# Altium PCB SPI-主板-开关.PcbDoc (part 4 of 11)
Units mm, origin at the board's own origin, x right, y up, seen from the top; angles counter-clockwise.
Board outline 97.69 x 103.45 mm, 2 copper layers (Top Layer, Bottom Layer); 86 components, 63 nets, 260 pads, 250 vias.
Unrouted connection lines stored in the file: 6.
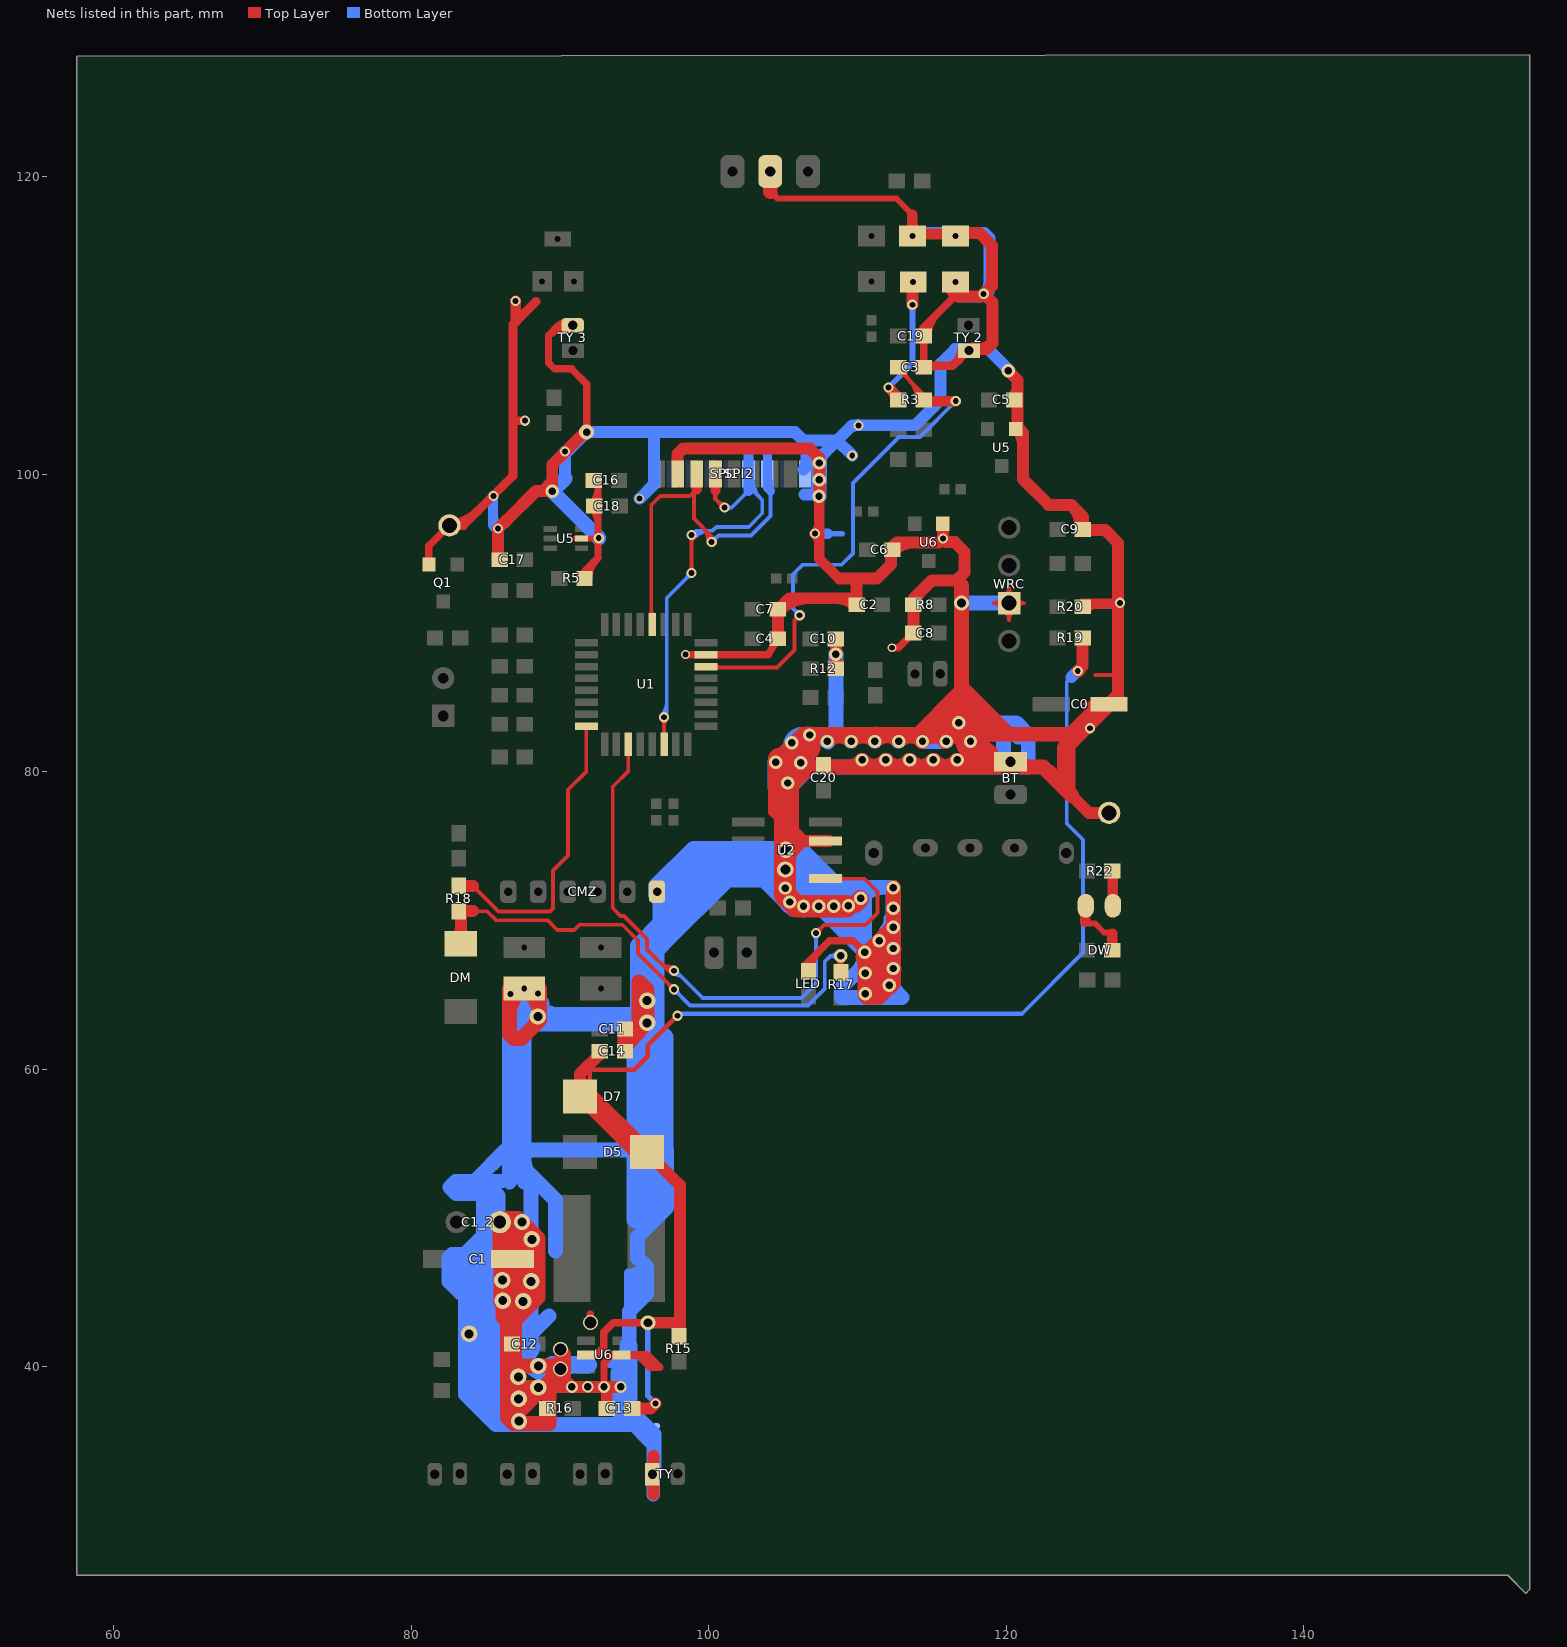
[diagram p4: the nets of this part, all layers, seen from the top]

## Via types
v1: diameter 0.9, hole 0.5, Top Layer to Bottom Layer, 104 vias
v2: diameter 0.68, hole 0.4, Top Layer to Bottom Layer, 100 vias
v3: diameter 1.1, hole 0.6, Top Layer to Bottom Layer, tented both sides, 16 vias
v4: diameter 1, hole 0.8, Top Layer to Bottom Layer, tented both sides, 8 vias
v5: diameter 1, hole 0.6, Top Layer to Bottom Layer, 4 vias
v6: diameter 0.8, hole 0.5, Top Layer to Bottom Layer, 4 vias
v7: diameter 0.7, hole 0.4, Top Layer to Bottom Layer, 4 vias
v8: diameter 0.6, hole 0.4, Top Layer to Bottom Layer, 3 vias
v9: diameter 1.1, hole 0.68, Top Layer to Bottom Layer, 2 vias
v10: diameter 0.8, hole 0.4, Top Layer to Bottom Layer, 2 vias
v11: diameter 1, hole 0.5, Top Layer to Bottom Layer, 1 vias
v12: diameter 0.9, hole 0.6, Top Layer to Bottom Layer, tented bottom, 1 vias
v13: diameter 1.2, hole 0.68, Top Layer to Bottom Layer, 1 vias

## Nets (pads, with @x,y where several pads share a name; then routed paths per layer and width w, separated by ;. In a path a pad name is that pad's centre, name@x,y a point inside that pad or via, vN(x,y) a via of type N, cw(c..) or ccw(c..) an arc to the next point about the centre after c; other vN are vias at no path point) (continued)
C-84: C13.1 C14.1 D5.2 D7.1 R15.1 R19.1 U6.5 | length 104.4
  Top Layer w0.3: D7.1@91.35,58.887 91.599,59.136 91.77,58.965 91.77,59.057 92.006,58.822 92.006,59.963 94.989,59.963 95.91,60.884 95.91,61.62 v2(97.892,63.602)
  Top Layer w0.5: D7.1@91.35,58.166 D7.1@91.77,58.166 ; U6.5@91.75,40.8 92.413,40.8 92.939,41.326 92.939,42.316 93.583,42.961 v5(95.91,42.961) ; D5.2@95.506,54.43 D5.2@95.85,54.43
  Top Layer w0.8: D7.1@91.35,58.166 91.35,58.887 91.35,59.688 C14.1@92.673,61.011 ; C13.1@94.85,37.2 96.092,37.2 v2(96.418,37.526) ; D5.2@95.85,54.43 98.069,52.211 98.069,42.961 ; v5(95.91,42.961) 98.069,42.961 ; R15.1@98,42.05 98.069,42.119 98.069,42.961 ; v2(124.816,86.792) 125.146,87.122 R19.1@125.146,89 ; v2@124.858,86.749 ccw(c124.163,87.444) 125.146,87.444 ; v2@124.858,86.749 ccw(c124.163,87.444) 125.146,87.444 ; v2@124.858,86.749 ccw(c124.163,87.444) 125.146,87.444
  Top Layer w1.5: D7.1@91.77,58.166 D5.2@95.506,54.43
  Bottom Layer w0.254: 121.049,63.721 125.171,67.843 125.171,75.438 124.079,76.53 124.079,86.055 v2(124.816,86.792) ; 124.452,86.428 ccw(c124.088,86.792) v2@124.603,86.792 ; 124.452,86.428 cw(c124.816,86.065) v2@124.816,86.579 ; 124.452,86.428 ccw(c124.088,86.792) v2@124.603,86.792 ; 124.452,86.428 cw(c124.816,86.065) v2@124.816,86.579 ; 124.452,86.428 ccw(c124.088,86.792) v2@124.603,86.792 ; 124.452,86.428 cw(c124.816,86.065) v2@124.816,86.579
  Bottom Layer w0.3: v2(97.892,63.602) 98.011,63.721 121.049,63.721
  Bottom Layer w0.35: v5(95.91,42.961) 95.91,38.034 v2(96.418,37.526)
  Bottom Layer w0.8: 124.384,86.36 v2(124.816,86.792) v2@124.841,86.792
CE: SPI1.6 SPI2.6 U1.12 | length 40.6
  Top Layer w0.254: U1.12@96.139,89.902 96.139,97.942 96.749,98.552 98.73,98.552 99.009,98.831 99.009,97.028 100.203,95.834 ; v2@100.203,95.326 100.203,95.834 ; 96.139,90.872 ccw(c96.644,90.872) U1.12@96.287,90.514 ; 96.139,90.872 ccw(c96.644,90.872) U1.12@96.287,90.514 ; 96.139,90.872 ccw(c96.644,90.872) U1.12@96.287,90.514 ; 99.57,96.467 cw(c98.556,95.453) v2@99.99,95.453 ; 99.57,96.467 cw(c98.556,95.453) v2@99.99,95.453 ; 99.57,96.467 cw(c98.556,95.453) v2@99.99,95.453 ; 99.901,95.784 ccw(c100.484,95.94) v2@100.182,95.418 ; 99.901,95.784 ccw(c100.484,95.94) v2@100.182,95.418 ; 99.901,95.784 ccw(c100.484,95.94) v2@100.182,95.418 ; 100.004,96.034 cw(c99.423,95.453) v2@100.244,95.453 ; 100.004,96.034 cw(c99.423,95.453) v2@100.244,95.453 ; 100.004,96.034 cw(c99.423,95.453) v2@100.244,95.453 ; v2@100.088,95.632 ccw(c100.007,95.759) 100.152,95.797 ; v2@100.088,95.632 ccw(c100.007,95.759) 100.152,95.797 ; v2@100.088,95.632 ccw(c100.007,95.759) 100.152,95.797 ; v2@100.091,95.635 ccw(c99.969,95.834) 100.203,95.834 ; v2@100.091,95.635 ccw(c99.969,95.834) 100.203,95.834 ; v2@100.091,95.635 ccw(c99.969,95.834) 100.203,95.834 ; 100.152,95.797 ccw(c100.363,95.854) v2@100.282,95.651 ; 100.152,95.797 ccw(c100.363,95.854) v2@100.282,95.651 ; 100.152,95.797 ccw(c100.363,95.854) v2@100.282,95.651 ; 100.203,95.834 ccw(c100.437,95.834) v2@100.315,95.635 ; 100.203,95.834 ccw(c100.437,95.834) v2@100.315,95.635 ; 100.203,95.834 ccw(c100.437,95.834) v2@100.315,95.635
  Top Layer w0.7: 99.187,99.009 SPI1.6@99.187,100.032
  Bottom Layer w0.254: v2(100.203,95.453) 100.221,95.453 100.653,95.885 102.845,95.885 104.165,97.206 104.165,98.882 ; v2@100.203,95.666 ccw(c100.203,96.224) 100.597,95.83 ; v2@100.203,95.666 ccw(c100.203,96.224) 100.597,95.83 ; v2@100.203,95.666 ccw(c100.203,96.224) 100.597,95.83 ; v2@100.416,95.453 cw(c100.887,95.453) 100.554,95.786 ; v2@100.416,95.453 cw(c100.887,95.453) 100.554,95.786 ; v2@100.416,95.453 cw(c100.887,95.453) 100.554,95.786
  Bottom Layer w0.6: 103.95,101.803 103.95,99.098 104.165,98.882 ; SPI2.6@104.062,99.502 ccw(c104.547,99.264) 104.165,98.882 ; SPI2.6@104.062,99.502 ccw(c104.547,99.264) 104.165,98.882 ; SPI2.6@104.062,99.502 ccw(c104.547,99.264) 104.165,98.882
CMD2: 
CSN: SPI1.5 SPI2.5 U1.30 | length 64.1
  Top Layer w0.254: U1.30@97,81.853 v2@97,83.668 ; v2@98.85,93.55 98.85,95.904 v2(98.857,95.91) ; v2@96.852,83.517 cw(c96.495,83.16) 97,83.16 ; v2@96.852,83.517 cw(c96.495,83.16) 97,83.16 ; v2@96.852,83.517 cw(c96.495,83.16) 97,83.16 ; U1.30@96.913,82.464 ccw(c96.703,82.674) 97,82.674 ; U1.30@96.913,82.464 ccw(c96.703,82.674) 97,82.674 ; U1.30@96.913,82.464 ccw(c96.703,82.674) 97,82.674 ; 97,82.674 ccw(c97.297,82.674) U1.30@97.087,82.464 ; 97,82.674 ccw(c97.297,82.674) U1.30@97.087,82.464 ; 97,82.674 ccw(c97.297,82.674) U1.30@97.087,82.464 ; 97,83.147 cw(c97.523,83.147) v2@97.153,83.517 ; 97,83.147 cw(c97.523,83.147) v2@97.153,83.517 ; 97,83.147 cw(c97.523,83.147) v2@97.153,83.517 ; v2@98.706,93.521 ccw(c98.359,93.868) 98.85,93.868 ; v2@98.706,93.521 ccw(c98.359,93.868) 98.85,93.868 ; v2@98.706,93.521 ccw(c98.359,93.868) 98.85,93.868 ; v2@98.706,95.76 cw(c98.359,95.413) 98.85,95.413 ; v2@98.706,95.76 cw(c98.359,95.413) 98.85,95.413 ; v2@98.706,95.76 cw(c98.359,95.413) 98.85,95.413 ; 98.85,93.901 ccw(c99.387,93.901) v2@99.007,93.521 ; 98.85,93.901 ccw(c99.387,93.901) v2@99.007,93.521 ; 98.85,93.901 ccw(c99.387,93.901) v2@99.007,93.521 ; 98.85,95.38 cw(c99.387,95.38) v2@99.007,95.76 ; 98.85,95.38 cw(c99.387,95.38) v2@99.007,95.76 ; 98.85,95.38 cw(c99.387,95.38) v2@99.007,95.76
  Top Layer w0.3: 100.457,98.933 100.457,98.349 v2@101.054,97.752 ; 100.699,98.107 ccw(c101.067,98.475) v2@101.067,97.955 ; 100.699,98.107 ccw(c101.067,98.475) v2@101.067,97.955 ; 100.699,98.107 ccw(c101.067,98.475) v2@101.067,97.955 ; 100.76,98.046 cw(c100.479,97.765) v2@100.877,97.765 ; 100.76,98.046 cw(c100.479,97.765) v2@100.877,97.765 ; 100.76,98.046 cw(c100.479,97.765) v2@100.877,97.765
  Top Layer w0.7: 100.457,98.933 SPI1.5@100.457,100.032
  Bottom Layer w0.254: v2@97,83.462 97,83.668 97.18,83.848 97.18,91.694 v2(98.857,93.37) ; 97.083,84.218 ccw(c97.356,84.06) v2@97.145,83.826 ; v2@98.837,95.875 ccw(c99.021,96.208) 99.212,95.878 ; v2(98.857,95.91) 99.162,96.215 100.265,96.215 100.519,96.469 102.692,96.469 103.607,97.384 103.607,98.274 SPI2.5@102.68,99.2 ; v2@98.912,96.116 ccw(c99.01,96.482) 99.2,96.154 ; v2@98.96,96.097 ccw(c99.275,96.668) 99.602,96.103 ; v2@99.068,95.887 cw(c99.473,95.842) 99.27,96.195 ; v2(101.067,97.765) 101.549,97.765 ; 102.68,98.895 101.549,97.765 ; 98.493,93.007 ccw(c98.13,93.37) 98.644,93.37 cw(c98.13,93.37) 98.493,93.007 ; 98.493,93.007 cw(c98.857,92.643) 98.857,93.157 ccw(c98.857,92.643) 98.493,93.007 ; v2@101.224,97.621 cw(c101.549,97.324) 101.549,97.765 ; v2@101.224,97.621 cw(c101.549,97.324) 101.549,97.765 ; v2@101.224,97.621 cw(c101.549,97.324) 101.549,97.765 ; v2@101.224,97.908 ccw(c101.549,98.205) 101.549,97.765 ; v2@101.224,97.908 ccw(c101.549,98.205) 101.549,97.765 ; v2@101.224,97.908 ccw(c101.549,98.205) 101.549,97.765 ; SPI2.5@102.605,99.268 cw(c102.51,98.905) 102.873,99.002 ; SPI2.5@102.605,99.268 cw(c102.51,98.905) 102.873,99.002 ; SPI2.5@102.605,99.268 cw(c102.51,98.905) 102.873,99.002 ; SPI2.5@102.658,99.518 cw(c102.138,98.594) 103.162,98.869 ; SPI2.5@102.658,99.518 cw(c102.138,98.594) 103.162,98.869 ; SPI2.5@102.658,99.518 cw(c102.138,98.594) 103.162,98.869 ; SPI2.5@102.724,99.557 ccw(c103.691,99.557) 103.007,98.873 ; SPI2.5@102.724,99.557 ccw(c103.691,99.557) 103.007,98.873 ; SPI2.5@102.724,99.557 ccw(c103.691,99.557) 103.007,98.873 ; 102.873,99.002 cw(c103.356,99.132) SPI2.5@102.932,99.398 ; 102.873,99.002 cw(c103.356,99.132) SPI2.5@102.932,99.398 ; 102.873,99.002 cw(c103.356,99.132) SPI2.5@102.932,99.398 ; SPI2.5@102.978,99.557 ccw(c104.558,99.557) 103.441,98.439 ; SPI2.5@102.978,99.557 ccw(c104.558,99.557) 103.441,98.439 ; SPI2.5@102.978,99.557 ccw(c104.558,99.557) 103.441,98.439 ; v2@96.852,83.818 ccw(c96.059,84.611) 97.18,84.611 cw(c96.059,84.611) v2@96.852,83.818 ; v2@97.032,83.639 ccw(c96.672,83.998) 97.18,83.998 cw(c96.672,83.998) v2@97.032,83.639 ; v2@98.828,95.939 cw(c99.494,95.274) 99.494,96.215 ccw(c99.494,95.274) v2@98.828,95.939 ; v2@99.007,95.76 cw(c100.107,94.66) 100.107,96.215 ccw(c100.107,94.66) v2@99.007,95.76
  Bottom Layer w0.7: 102.68,98.895 102.68,101.752
  other v2: 97.003,83.668
DM: R18.2 U1.24 | length 21.8
  Top Layer w0.254: R18.2@83.134,72.332 R18.2@83.584,72.332 ; 84.158,72.332 85.877,70.612 89.332,70.612 89.535,70.815 89.535,73.355 90.551,74.371 90.551,78.791 91.775,80.015 U1.24@91.775,83.078 ; U1.24@91.688,82.991 cw(c91.478,82.781) 91.775,82.781 ; U1.24@91.688,82.991 cw(c91.478,82.781) 91.775,82.781 ; U1.24@91.688,82.991 cw(c91.478,82.781) 91.775,82.781 ; 91.775,82.781 cw(c92.072,82.781) U1.24@91.862,82.991 ; 91.775,82.781 cw(c92.072,82.781) U1.24@91.862,82.991 ; 91.775,82.781 cw(c92.072,82.781) U1.24@91.862,82.991
  Top Layer w0.8: R18.2@83.584,72.332 84.158,72.332
DMD: DM.2 R17.2 R18.1 | length 51.6
  Top Layer w0.254: R18.1@83.34,70.426 83.134,70.632 R18.1@83.593,70.632 ; 84.51,70.632 85.096,70.632 85.7,70.027 89.155,70.027 89.814,69.367 90.957,69.367 91.313,69.723 94.183,69.723 95.25,68.656 95.25,67.793 v2(97.663,65.38) ; R17.2@108.588,66.716 ccw(c108.471,67.118) 108.89,67.118 ; R17.2@108.587,66.973 ccw(c108.456,67.386) v1@108.89,67.386 ; v1@108.649,67.399 cw(c108.067,66.817) R17.2@108.89,66.817 ; v1(108.877,67.627) 108.877,67.399 v1@108.89,67.386 ; R17.2@108.89,66.531 v1@108.89,67.386 ; R17.2@108.89,66.878 cw(c109.626,66.878) v1@109.105,67.399 ; 97.299,65.743 ccw(c97.663,66.107) v2@97.663,65.593 ; 97.299,65.743 cw(c96.936,65.38) v2@97.45,65.38 ; 97.299,65.743 ccw(c97.663,66.107) v2@97.663,65.593 ; 97.299,65.743 cw(c96.936,65.38) v2@97.45,65.38 ; 97.299,65.743 ccw(c97.663,66.107) v2@97.663,65.593 ; 97.299,65.743 cw(c96.936,65.38) v2@97.45,65.38
  Top Layer w0.8: DM.2@83.34,68.432 R18.1@83.34,70.426 ; R18.1@83.593,70.632 84.158,70.632 ; DM.2@83.022,68.75 ccw(c82.254,69.518) 83.34,69.518 ; DM.2@83.022,68.75 ccw(c82.254,69.518) 83.34,69.518 ; DM.2@83.022,68.75 ccw(c82.254,69.518) 83.34,69.518 ; R18.1@83.129,70.511 cw(c82.621,70.002) 83.34,70.002 ; R18.1@83.129,70.511 cw(c82.621,70.002) 83.34,70.002 ; R18.1@83.129,70.511 cw(c82.621,70.002) 83.34,70.002 ; 83.34,69.518 ccw(c84.426,69.518) DM.2@83.658,68.75 ; 83.34,69.518 ccw(c84.426,69.518) DM.2@83.658,68.75 ; 83.34,69.518 ccw(c84.426,69.518) DM.2@83.658,68.75
  Bottom Layer w0.254: v2(97.663,65.38) 98.679,64.364 98.751,64.291 106.684,64.291 107.798,65.405 107.798,67.234 108.191,67.627 ; v1(108.877,67.627) 108.191,67.627 ; v2@97.663,65.167 cw(c97.663,64.652) 98.027,65.016 ; v2@97.663,65.167 cw(c97.663,64.652) 98.027,65.016 ; v2@97.663,65.167 cw(c97.663,64.652) 98.027,65.016 ; v2@97.876,65.38 ccw(c98.39,65.38) 98.027,65.016 ; v2@97.876,65.38 ccw(c98.39,65.38) 98.027,65.016 ; v2@97.876,65.38 ccw(c98.39,65.38) 98.027,65.016 ; 108.191,67.627 ccw(c108.191,68.194) v1@108.628,67.833 ; 108.191,67.627 cw(c108.191,67.061) v1@108.628,67.422 ; 108.191,67.627 ccw(c108.191,68.194) v1@108.628,67.833 ; 108.191,67.627 cw(c108.191,67.061) v1@108.628,67.422 ; 108.191,67.627 ccw(c108.191,68.194) v1@108.628,67.833 ; 108.191,67.627 cw(c108.191,67.061) v1@108.628,67.422
DW: pad.4@127.178,71 R22.1 | length 2.5
  Top Layer w0.7: R22.1@127.139,73.33 127.178,73.291 pad.4@127.178,70.815
DW+: DW.1 pad.4@125.349,71 | length 4.2
  Top Layer w0.4: 125.324,69.901 125.422,69.803 125.981,69.803 126.583,69.2 127.066,69.2 127.139,69.127
  Top Layer w0.7: 125.324,69.901 pad.4@125.324,70.841 ; DW.1@127.139,68 127.139,69.127
FI-R: U1.27 U2.1 | length 62.6
  Top Layer w0.254: U1.27@94.6,81.853 94.6,80.046 93.548,78.994 93.548,70.841 94.082,70.307 94.31,70.307 94.317,70.307 95.86,68.765 95.86,68.047 97.282,66.624 ; v2(97.663,66.624) 97.282,66.624 ; v2(107.213,69.164) 107.747,69.698 110.541,69.698 111.354,70.51 111.354,71.933 110.469,72.817 U2.1@108.154,72.817 ; U1.27@94.513,81.241 cw(c94.303,81.031) 94.6,81.031 ; U1.27@94.513,81.241 cw(c94.303,81.031) 94.6,81.031 ; U1.27@94.513,81.241 cw(c94.303,81.031) 94.6,81.031 ; 94.6,81.031 cw(c94.897,81.031) U1.27@94.687,81.241 ; 94.6,81.031 cw(c94.897,81.031) U1.27@94.687,81.241 ; 94.6,81.031 cw(c94.897,81.031) U1.27@94.687,81.241 ; 96.649,67.257 ccw(c97.663,68.271) v2@97.663,66.837 ; 96.649,67.257 ccw(c97.663,68.271) v2@97.663,66.837 ; 96.649,67.257 ccw(c97.663,68.271) v2@97.663,66.837 ; 97.083,66.824 ccw(c97.663,67.404) v2@97.663,66.583 ; 97.083,66.824 ccw(c97.663,67.404) v2@97.663,66.583 ; 97.083,66.824 ccw(c97.663,67.404) v2@97.663,66.583 ; 97.282,66.624 ccw(c97.282,66.858) v2@97.482,66.736 ; 97.282,66.624 cw(c97.282,66.39) v2@97.482,66.513 ; 97.282,66.624 ccw(c97.282,66.858) v2@97.482,66.736 ; 97.282,66.624 cw(c97.282,66.39) v2@97.482,66.513 ; 97.282,66.624 ccw(c97.282,66.858) v2@97.482,66.736 ; 97.282,66.624 cw(c97.282,66.39) v2@97.482,66.513 ; 97.319,66.675 ccw(c97.358,66.82) v2@97.484,66.739 ; 97.319,66.675 cw(c97.262,66.465) v2@97.465,66.545 ; 97.319,66.675 ccw(c97.358,66.82) v2@97.484,66.739 ; 97.319,66.675 cw(c97.262,66.465) v2@97.465,66.545 ; 97.319,66.675 ccw(c97.358,66.82) v2@97.484,66.739 ; 97.319,66.675 cw(c97.262,66.465) v2@97.465,66.545 ; 97.332,66.926 cw(c97.176,66.343) v2@97.699,66.645 ; 97.332,66.926 cw(c97.176,66.343) v2@97.699,66.645 ; 97.332,66.926 cw(c97.176,66.343) v2@97.699,66.645 ; v2@107.213,69.377 ccw(c107.213,69.891) 107.577,69.528 ; v2@107.213,69.377 ccw(c107.213,69.891) 107.577,69.528 ; v2@107.213,69.377 ccw(c107.213,69.891) 107.577,69.528 ; v2@107.426,69.164 cw(c107.941,69.164) 107.577,69.528 ; v2@107.426,69.164 cw(c107.941,69.164) 107.577,69.528 ; v2@107.426,69.164 cw(c107.941,69.164) 107.577,69.528 ; U2.1@108.776,72.695 cw(c109.072,72.399) 109.072,72.817 ; U2.1@108.776,72.695 cw(c109.072,72.399) 109.072,72.817 ; U2.1@108.776,72.695 cw(c109.072,72.399) 109.072,72.817 ; U2.1@108.776,72.939 ccw(c109.072,73.235) 109.072,72.817 ; U2.1@108.776,72.939 ccw(c109.072,73.235) 109.072,72.817 ; U2.1@108.776,72.939 ccw(c109.072,73.235) 109.072,72.817
  Bottom Layer w0.254: v2@97.765,66.624 99.568,64.821 99.589,64.799 106.252,64.799 106.274,64.821 107.213,65.761 v2(107.213,69.164) ; v2@97.624,66.61 ccw(c98.026,66.756) 97.916,66.344 ; v2@97.624,66.61 ccw(c98.026,66.756) 97.916,66.344 ; v2@97.624,66.61 ccw(c98.026,66.756) 97.916,66.344 ; v2@97.663,66.411 cw(c97.663,65.652) 98.2,66.189 ; v2@97.663,66.411 cw(c97.663,65.652) 98.2,66.189 ; v2@97.663,66.411 cw(c97.663,65.652) 98.2,66.189 ; v2@97.876,66.624 ccw(c98.145,66.624) 97.955,66.434 ; v2@97.876,66.624 ccw(c98.145,66.624) 97.955,66.434 ; v2@97.876,66.624 ccw(c98.145,66.624) 97.955,66.434 ; v2@107.063,69.014 cw(c106.699,68.65) 107.213,68.65 ; v2@107.063,69.014 cw(c106.699,68.65) 107.213,68.65 ; v2@107.063,69.014 cw(c106.699,68.65) 107.213,68.65 ; 107.213,68.65 cw(c107.728,68.65) v2@107.364,69.014 ; 107.213,68.65 cw(c107.728,68.65) v2@107.364,69.014 ; 107.213,68.65 cw(c107.728,68.65) v2@107.364,69.014
FL: pad.0@113.75,112.932 R3.2 | length 13.4
  Top Layer w0.254: pad.0@113.65,112.822 113.538,112.822 113.538,112.932 pad.0@113.75,112.932
  Top Layer w0.6: pad.0@113.65,112.822 pad.0@113.69,112.862
  Top Layer w0.7: v2(112.09,105.842) R3.2@112.725,105.207 ; v2@112.28,105.652 cw(c111.628,105) R3.2@112.55,105 ; v2@112.28,105.652 cw(c111.628,105) R3.2@112.55,105 ; v2@112.28,105.652 cw(c111.628,105) R3.2@112.55,105
  Top Layer w0.8: v2(113.69,111.404) pad.0@113.69,112.862 ; 113.69,112.064 cw(c114.618,112.064) pad.0@113.962,112.72 ; 113.69,112.064 cw(c114.618,112.064) pad.0@113.962,112.72 ; 113.69,112.064 cw(c114.618,112.064) pad.0@113.962,112.72
  Bottom Layer w0.4: v2(112.09,105.842) 113.69,107.442 v2(113.69,111.404)
FL-U: C3.2 R3.1 U1.6 | length 69
  Top Layer w0.254: U1.6@99.825,87.077 99.882,87.02 104.597,87.02 105.766,88.189 105.766,90.17 ; v2(106.121,90.526) 105.766,90.17 ; C3.2@112.65,107.162 114.45,105.362 R3.1@114.45,105 ; 113.921,105.61 cw(c113.595,105.266) R3.1@114.046,105.117 ; 114.026,105.511 ccw(c114.375,105.881) R3.1@114.389,105.373 ; U1.6@100.437,87.164 ccw(c100.785,87.512) 100.785,87.02 ; U1.6@100.437,87.164 ccw(c100.785,87.512) 100.785,87.02 ; U1.6@100.437,87.164 ccw(c100.785,87.512) 100.785,87.02 ; 105.766,90.17 ccw(c105.421,90.514) v2@105.908,90.522 ; 105.766,90.17 cw(c106.11,89.826) v2@106.118,90.313 ; 105.766,90.17 ccw(c105.421,90.514) v2@105.908,90.522 ; 105.766,90.17 cw(c106.11,89.826) v2@106.118,90.313 ; 105.766,90.17 ccw(c105.421,90.514) v2@105.908,90.522 ; 105.766,90.17 cw(c106.11,89.826) v2@106.118,90.313 ; 105.855,90.312 cw(c106.193,90.227) v2@106.112,90.565 ; 105.855,90.312 cw(c106.193,90.227) v2@106.112,90.565 ; 105.855,90.312 cw(c106.193,90.227) v2@106.112,90.565 ; 105.907,90.26 ccw(c105.823,90.597) v2@106.161,90.516 ; 105.907,90.26 ccw(c105.823,90.597) v2@106.161,90.516 ; 105.907,90.26 ccw(c105.823,90.597) v2@106.161,90.516 ; C3.2@112.8,106.827 cw(c112.8,106.381) 113.115,106.696 ; C3.2@112.8,106.827 cw(c112.8,106.381) 113.115,106.696 ; C3.2@112.8,106.827 cw(c112.8,106.381) 113.115,106.696 ; C3.2@112.847,107.327 cw(c112.613,106.697) C3.2@113.261,106.871 ; C3.2@112.847,107.327 cw(c112.613,106.697) C3.2@113.261,106.871 ; C3.2@112.847,107.327 cw(c112.613,106.697) C3.2@113.261,106.871 ; C3.2@112.919,107.2 ccw(c113.661,107.2) 113.136,106.675 ; C3.2@112.919,107.2 ccw(c113.661,107.2) 113.136,106.675 ; C3.2@112.919,107.2 ccw(c113.661,107.2) 113.136,106.675 ; C3.2@113.173,107.2 ccw(c114.528,107.2) 113.57,106.242 ; C3.2@113.173,107.2 ccw(c114.528,107.2) 113.57,106.242 ; C3.2@113.173,107.2 ccw(c114.528,107.2) 113.57,106.242 ; 113.472,106.339 cw(c112.133,105) R3.1@114.027,105 ; 113.472,106.339 cw(c112.133,105) R3.1@114.027,105 ; 113.472,106.339 cw(c112.133,105) R3.1@114.027,105 ; 113.764,105.981 ccw(c115.126,106.346) R3.1@114.456,105.105 ; 113.764,105.981 ccw(c115.126,106.346) R3.1@114.456,105.105 ; 113.764,105.981 ccw(c115.126,106.346) R3.1@114.456,105.105 ; 113.906,105.906 cw(c113,105) R3.1@114.281,105 ; 113.906,105.906 cw(c113,105) R3.1@114.281,105 ; 113.906,105.906 cw(c113,105) R3.1@114.281,105 ; R3.1@113.917,105.412 ccw(c114.741,105.633) R3.1@114.336,104.881 ; R3.1@113.917,105.412 ccw(c114.741,105.633) R3.1@114.336,104.881 ; R3.1@113.917,105.412 ccw(c114.741,105.633) R3.1@114.336,104.881 ; R3.1@114.077,105.187 ccw(c113.637,105.441) 114.128,105.572 ; R3.1@114.077,105.187 ccw(c113.637,105.441) 114.128,105.572 ; R3.1@114.077,105.187 ccw(c113.637,105.441) 114.128,105.572
  Top Layer w0.7: R3.1@114.45,105 114.523,104.927 v2(116.611,104.927) ; R3.1@114.606,105.106 ccw(c115.038,105.538) 115.038,104.927 ; R3.1@114.606,105.106 ccw(c115.038,105.538) 115.038,104.927 ; R3.1@114.606,105.106 ccw(c115.038,105.538) 115.038,104.927
  Bottom Layer w0.254: v2(106.121,90.526) 105.664,90.983 105.664,93.269 106.126,93.731 106.149,93.731 106.348,93.929 108.947,93.929 109.703,94.684 109.703,99.416 112.801,102.514 114.198,102.514 v2(116.611,104.927) ; 105.758,90.889 ccw(c106.121,91.253) 106.121,90.739 cw(c106.121,91.253) 105.758,90.889 ; 105.758,90.889 cw(c105.394,90.526) 105.908,90.526 ccw(c105.394,90.526) 105.758,90.889 ; 116.248,104.564 ccw(c115.884,104.927) 116.398,104.927 cw(c115.884,104.927) 116.248,104.564 ; 116.248,104.564 cw(c116.611,104.2) 116.611,104.714 ccw(c116.611,104.2) 116.248,104.564
GND: "TY 2.2" "TY 3.2" BT.2 C0.2 C1.1 C1_2.1 C2.1 C3.1 C4.2 C5.1 C6.2 C7.1 C8.1 C9.1 C10.1 C11.2 C12.2 C13.2 C14.2 C16.1 C17.2 C18.1 C19.1 C20.1 CMZ.2 LED.1 pad.0@87.6,65.432 pad.0@96.33,100.032 pad.0@96.495,36.017 pad.0@104.14,120.36 pad.0@113.7,116.032 pad.0@116.6,112.932 pad.0@116.6,116.032 pad.4@82.575,96.571 pad.4@126.924,77.241 Q1.2 R5.1 R8.2 R12.1 R16.2 R20.1 SPI1.7 SPI2.8 TY.2 U1.7 U2.3 U5.1@120.65,103.05 U5.2@91.45,95.682 U6.1@115.75,96.682 U6.2@94.15,40.8 WRC.2 | length 3122.8
  Top Layer w0.254: 87.02,110.28 87.03,110.271 ; 126.009,86.512 127.406,86.512 ; C0.2@126.913,84.546 126.695,84.557 125.298,84.557 ; 119.126,91.338 ccw(c119.126,91.951) WRC.2@119.659,91.648 ; 119.126,91.338 cw(c119.126,90.722) WRC.2@119.66,91.03 ; 119.126,91.338 ccw(c119.126,91.951) WRC.2@119.659,91.648 ; 119.126,91.338 cw(c119.126,90.722) WRC.2@119.66,91.03 ; 119.126,91.338 ccw(c119.126,91.951) WRC.2@119.659,91.648 ; 119.126,91.338 cw(c119.126,90.722) WRC.2@119.66,91.03 ; 119.126,91.338 121.204,91.338 ; WRC.2@119.864,90.816 cw(c119.478,90.214) 120.193,90.214 ; WRC.2@119.864,90.816 cw(c119.478,90.214) 120.193,90.214 ; WRC.2@119.864,90.816 cw(c119.478,90.214) 120.193,90.214 ; WRC.2@119.913,91.893 ccw(c119.672,92.354) 120.193,92.354 ; WRC.2@119.913,91.893 ccw(c119.672,92.354) 120.193,92.354 ; WRC.2@119.913,91.893 ccw(c119.672,92.354) 120.193,92.354 ; 120.193,90.214 cw(c120.892,90.214) WRC.2@120.526,90.809 ; 120.193,90.214 cw(c120.892,90.214) WRC.2@120.526,90.809 ; 120.193,90.214 cw(c120.892,90.214) WRC.2@120.526,90.809 ; 120.193,90.214 120.193,92.354 ; 120.193,92.354 ccw(c120.701,92.354) WRC.2@120.476,91.899 ; 120.193,92.354 ccw(c120.701,92.354) WRC.2@120.476,91.899 ; 120.193,92.354 ccw(c120.701,92.354) WRC.2@120.476,91.899 ; WRC.2@120.758,91.062 cw(c121.204,90.84) 121.204,91.338 ; WRC.2@120.758,91.062 cw(c121.204,90.84) 121.204,91.338 ; WRC.2@120.758,91.062 cw(c121.204,90.84) 121.204,91.338 ; WRC.2@120.759,91.615 ccw(c121.204,91.835) 121.204,91.338 ; WRC.2@120.759,91.615 ccw(c121.204,91.835) 121.204,91.338 ; WRC.2@120.759,91.615 ccw(c121.204,91.835) 121.204,91.338 ; 125.298,84.557 ccw(c125.298,85.397) C0.2@125.897,84.807 ; 125.298,84.557 cw(c125.298,83.763) C0.2@125.886,84.296 ; 125.298,84.557 ccw(c125.298,85.397) C0.2@125.897,84.807 ; 125.298,84.557 cw(c125.298,83.763) C0.2@125.886,84.296 ; 125.298,84.557 ccw(c125.298,85.397) C0.2@125.897,84.807 ; 125.298,84.557 cw(c125.298,83.763) C0.2@125.886,84.296
  Top Layer w0.39: U5.2@91.05,95.682 92.317,95.682 v2(92.608,95.707) ; 92.197,95.682 ccw(c92.197,96.119) v2@92.506,95.81 ; 92.197,95.682 ccw(c92.197,96.119) v2@92.506,95.81 ; 92.197,95.682 ccw(c92.197,96.119) v2@92.506,95.81
  Top Layer w0.4: 104.14,119.024 104.623,118.542 ; 113.7,117.465 112.624,118.542 104.623,118.542 ; pad.0@104.031,120.114 ccw(c104.545,119.623) 104.043,119.121 ; pad.0@104.031,120.114 ccw(c104.545,119.623) 104.043,119.121 ; pad.0@104.031,120.114 ccw(c104.545,119.623) 104.043,119.121 ; pad.0@104.321,119.837 ccw(c104.842,119.341) 104.333,118.831 ; pad.0@104.321,119.837 ccw(c104.842,119.341) 104.333,118.831 ; pad.0@104.321,119.837 ccw(c104.842,119.341) 104.333,118.831 ; pad.0@104.61,119.561 ccw(c105.139,119.058) 104.623,118.542 ; pad.0@104.61,119.561 ccw(c105.139,119.058) 104.623,118.542 ; pad.0@104.61,119.561 ccw(c105.139,119.058) 104.623,118.542
  Top Layer w0.495: 88.63,98.882 89.484,99.736 ; 89.484,100.66 v2(90.348,101.524) ; v8@98.45,87.877 U1.7@99.825,87.877 104.006,87.877 C4.2@104.523,88.724 ; pad.0@104.14,119.832 pad.0@104.14,119.982 ; C4.2@104.65,88.951 104.419,88.951 C4.2@104.65,89.181 ; v1@107.417,98.501 v1@107.442,98.476 ; pad.0@114.021,116.281 118.11,116.281 ; C3.1@114.45,107.3 114.45,109.885 ; C19.1@114.74,109.378 cw(c115.368,109.58) 114.902,110.047 ; pad.0@116.4,112.822 116.4,112.59 116.4,112.302 116.4,111.835 114.45,109.885 ; C0.2@126.913,84.546 126.924,84.328 C0.2@126.924,84.633 ; v2@85.847,96.455 ccw(c85.847,97.315) 86.455,96.707 ; v2@85.847,96.455 ccw(c85.847,97.315) 86.455,96.707 ; v2@85.847,96.455 ccw(c85.847,97.315) 86.455,96.707 ; v2@85.927,96.317 cw(c86.385,96.052) 86.248,96.563 ; v2@85.927,96.317 cw(c86.385,96.052) 86.248,96.563 ; v2@85.927,96.317 cw(c86.385,96.052) 86.248,96.563 ; 104.262,88.296 ccw(c103.589,88.706) C4.2@104.355,88.891 ; 104.262,88.296 ccw(c103.589,88.706) C4.2@104.355,88.891 ; 104.262,88.296 ccw(c103.589,88.706) C4.2@104.355,88.891 ; C19.1@114.257,109.3 cw(c115.206,109.3) 114.535,109.97 ; C19.1@114.257,109.3 cw(c115.206,109.3) 114.535,109.97 ; C19.1@114.257,109.3 cw(c115.206,109.3) 114.535,109.97 ; C3.1@114.271,107.379 ccw(c113.84,107.81) 114.45,107.81 ; C3.1@114.271,107.379 ccw(c113.84,107.81) 114.45,107.81 ; C3.1@114.271,107.379 ccw(c113.84,107.81) 114.45,107.81 ; C19.1@114.271,109.121 cw(c113.84,108.69) 114.45,108.69 ; C19.1@114.271,109.121 cw(c113.84,108.69) 114.45,108.69 ; C19.1@114.271,109.121 cw(c113.84,108.69) 114.45,108.69 ; C19.1@114.277,109.484 ccw(c113.898,109.885) 114.45,109.885 ; C19.1@114.277,109.484 ccw(c113.898,109.885) 114.45,109.885 ; C19.1@114.277,109.484 ccw(c113.898,109.885) 114.45,109.885 ; C19.1@114.374,109.519 ccw(c113.653,110.768) 115.046,110.394 ; C19.1@114.374,109.519 ccw(c113.653,110.768) 115.046,110.394 ; C19.1@114.374,109.519 ccw(c113.653,110.768) 115.046,110.394 ; 114.45,107.81 ccw(c115.059,107.81) C3.1@114.629,107.379 ; 114.45,107.81 ccw(c115.059,107.81) C3.1@114.629,107.379 ; 114.45,107.81 ccw(c115.059,107.81) C3.1@114.629,107.379 ; 114.45,108.69 cw(c115.06,108.69) C19.1@114.629,109.121 ; 114.45,108.69 cw(c115.06,108.69) C19.1@114.629,109.121 ; 114.45,108.69 cw(c115.06,108.69) C19.1@114.629,109.121 ; 114.45,109.885 ccw(c115.002,109.885) C19.1@114.623,109.484 ; 114.45,109.885 ccw(c115.002,109.885) C19.1@114.623,109.484 ; 114.45,109.885 ccw(c115.002,109.885) C19.1@114.623,109.484 ; C19.1@114.752,109.3 cw(c116.896,109.3) 115.38,110.815 ; C19.1@114.752,109.3 cw(c116.896,109.3) 115.38,110.815 ; C19.1@114.752,109.3 cw(c116.896,109.3) 115.38,110.815 ; pad.0@116.08,112.612 cw(c115.308,111.839) 116.4,111.839 ; pad.0@116.08,112.612 cw(c115.308,111.839) 116.4,111.839 ; pad.0@116.08,112.612 cw(c115.308,111.839) 116.4,111.839 ; 116.4,111.839 cw(c117.492,111.839) pad.0@116.72,112.612 ; 116.4,111.839 cw(c117.492,111.839) pad.0@116.72,112.612 ; 116.4,111.839 cw(c117.492,111.839) pad.0@116.72,112.612